# Altium PCB Arduino_DUE_Magic_Pen_rev03_no_FTD.PcbDoc (part 1 of 2)
Units mil, origin at the board's own origin, x right, y up, seen from the top; angles counter-clockwise.
Board outline 4416.66 x 2112 mil, 4 copper layers (Top Layer, Mid-Layer 1, Mid-Layer 2, Bottom Layer); 151 components, 188 nets, 610 pads, 191 vias.
Unrouted connection lines stored in the file: 5.
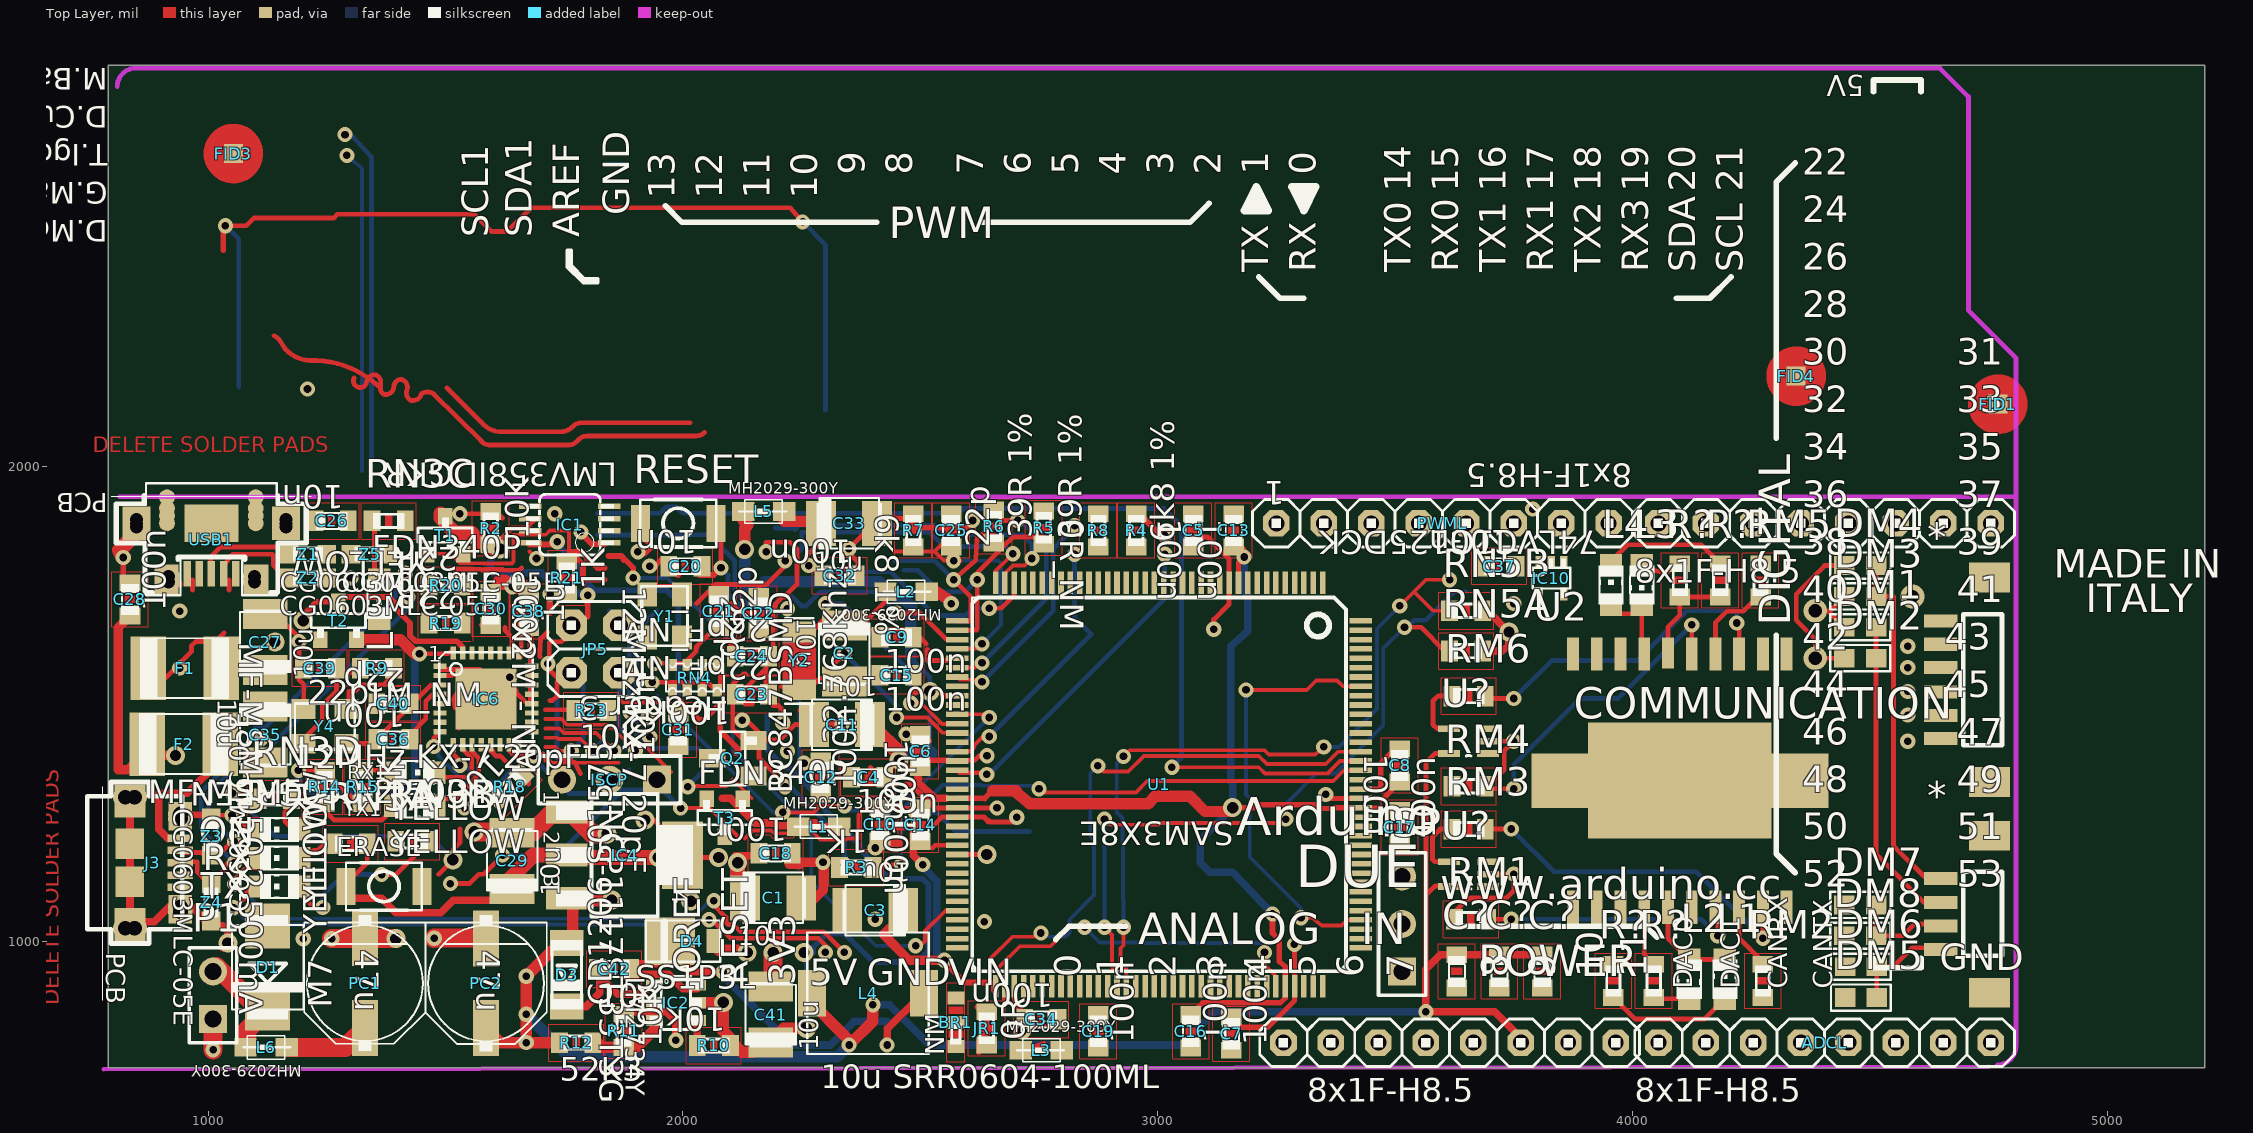
[diagram p0: Top Layer view]
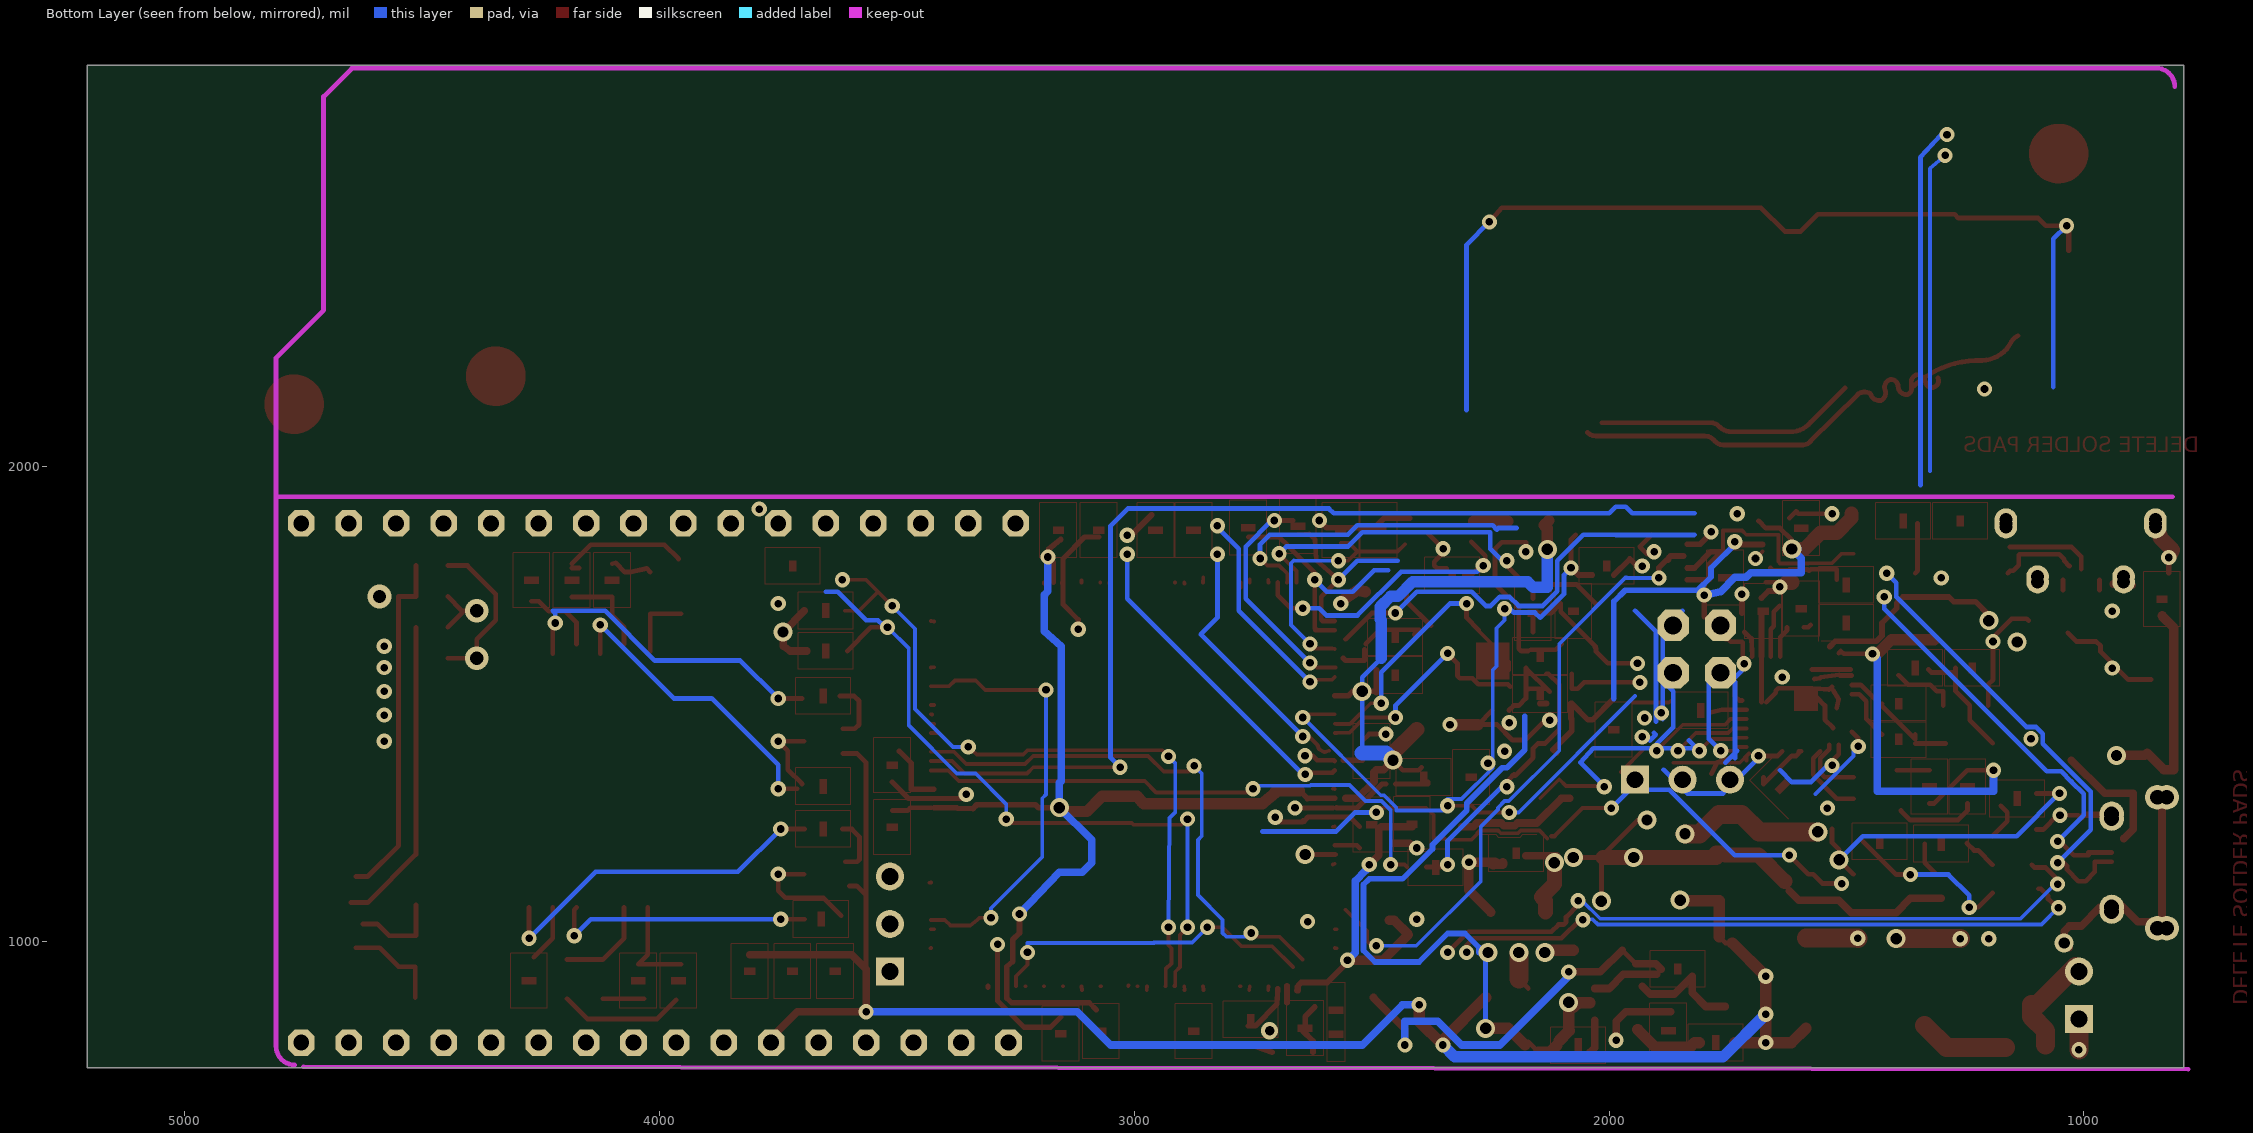
[diagram p1: Bottom Layer view, seen from below]
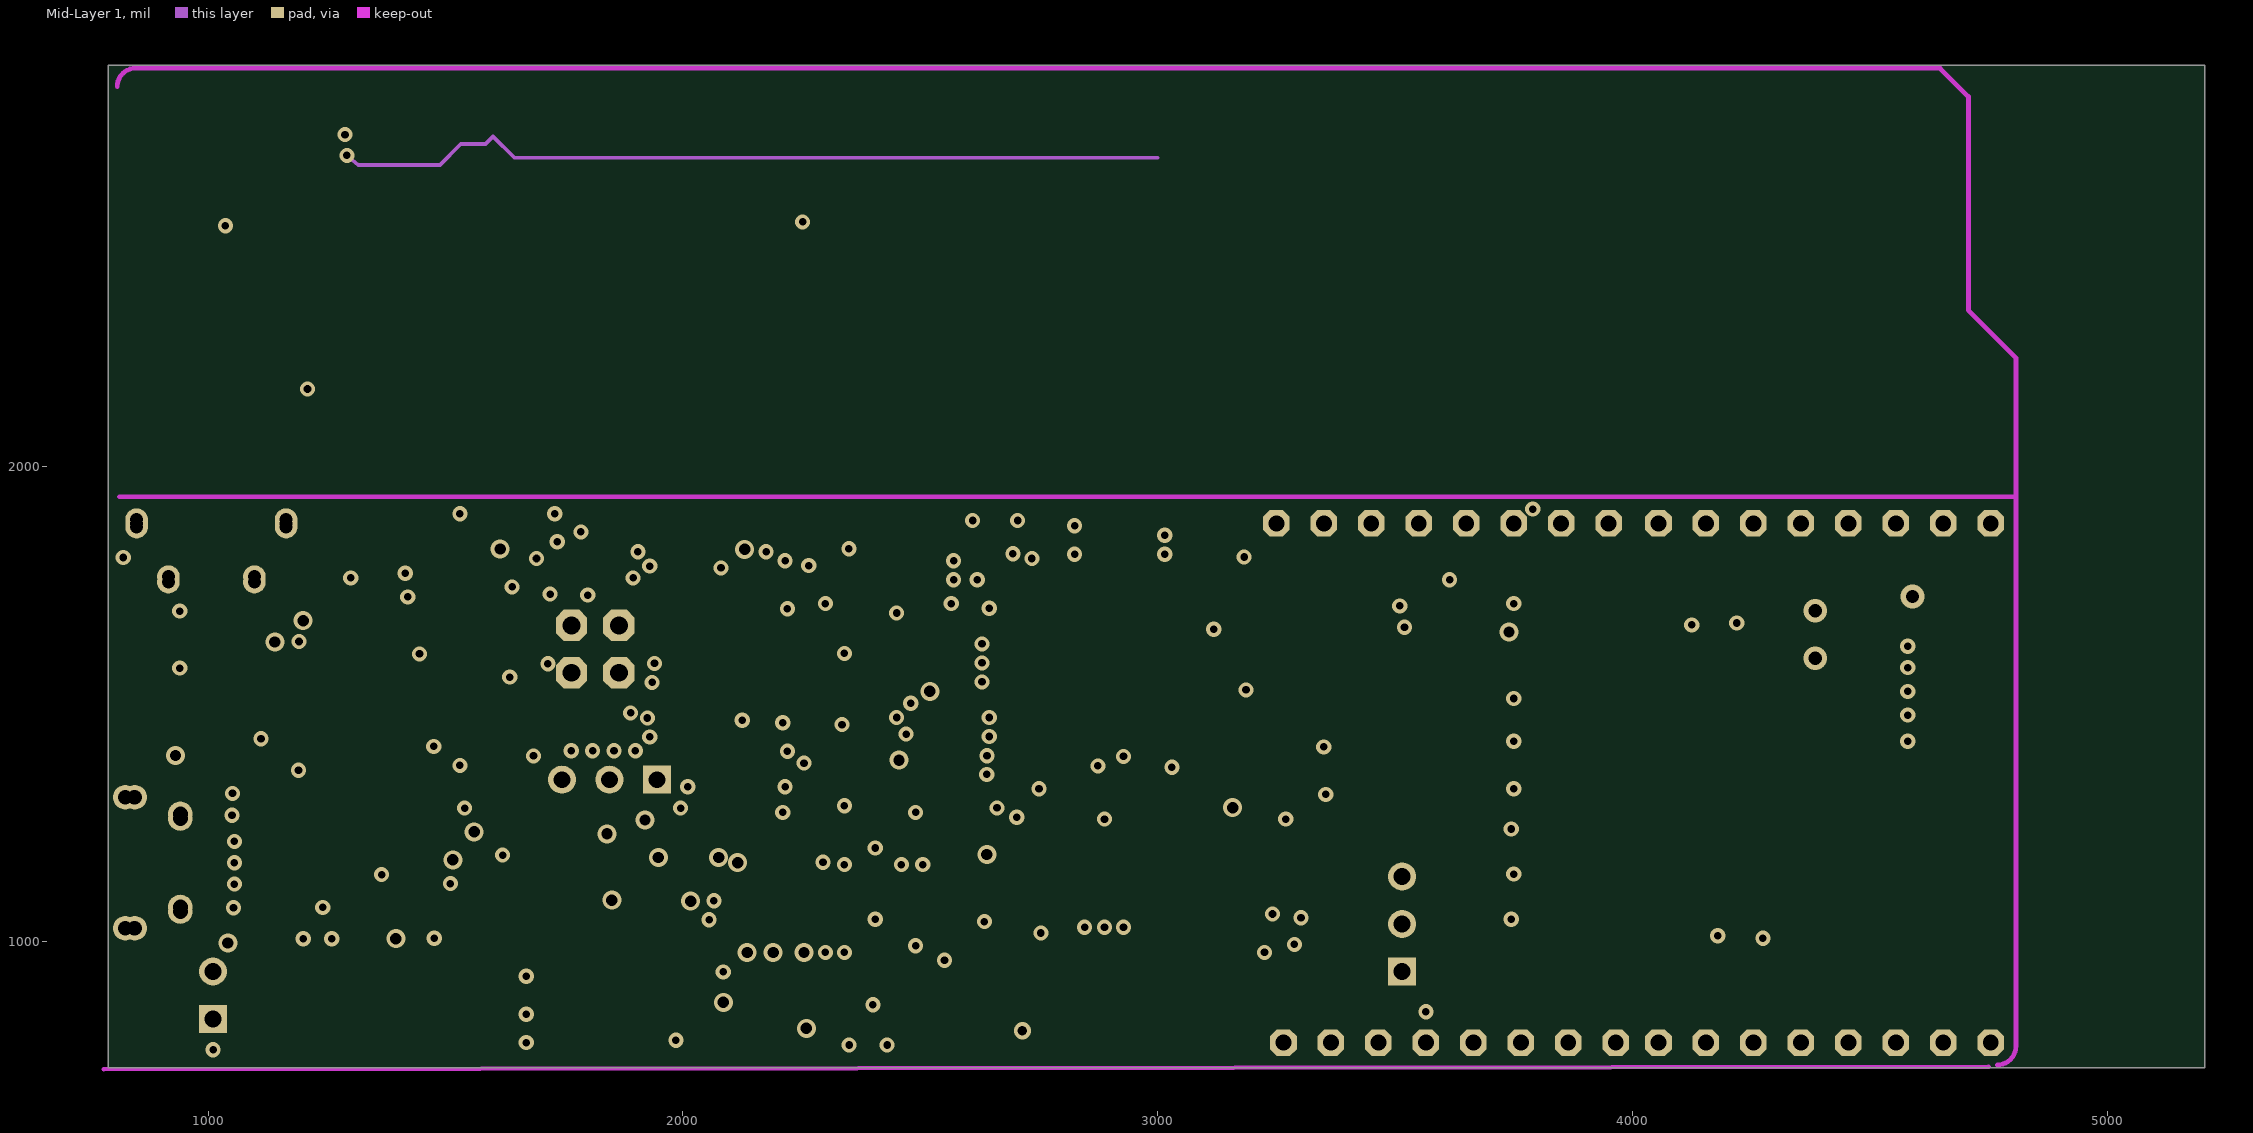
[diagram p2: Mid-Layer 1]
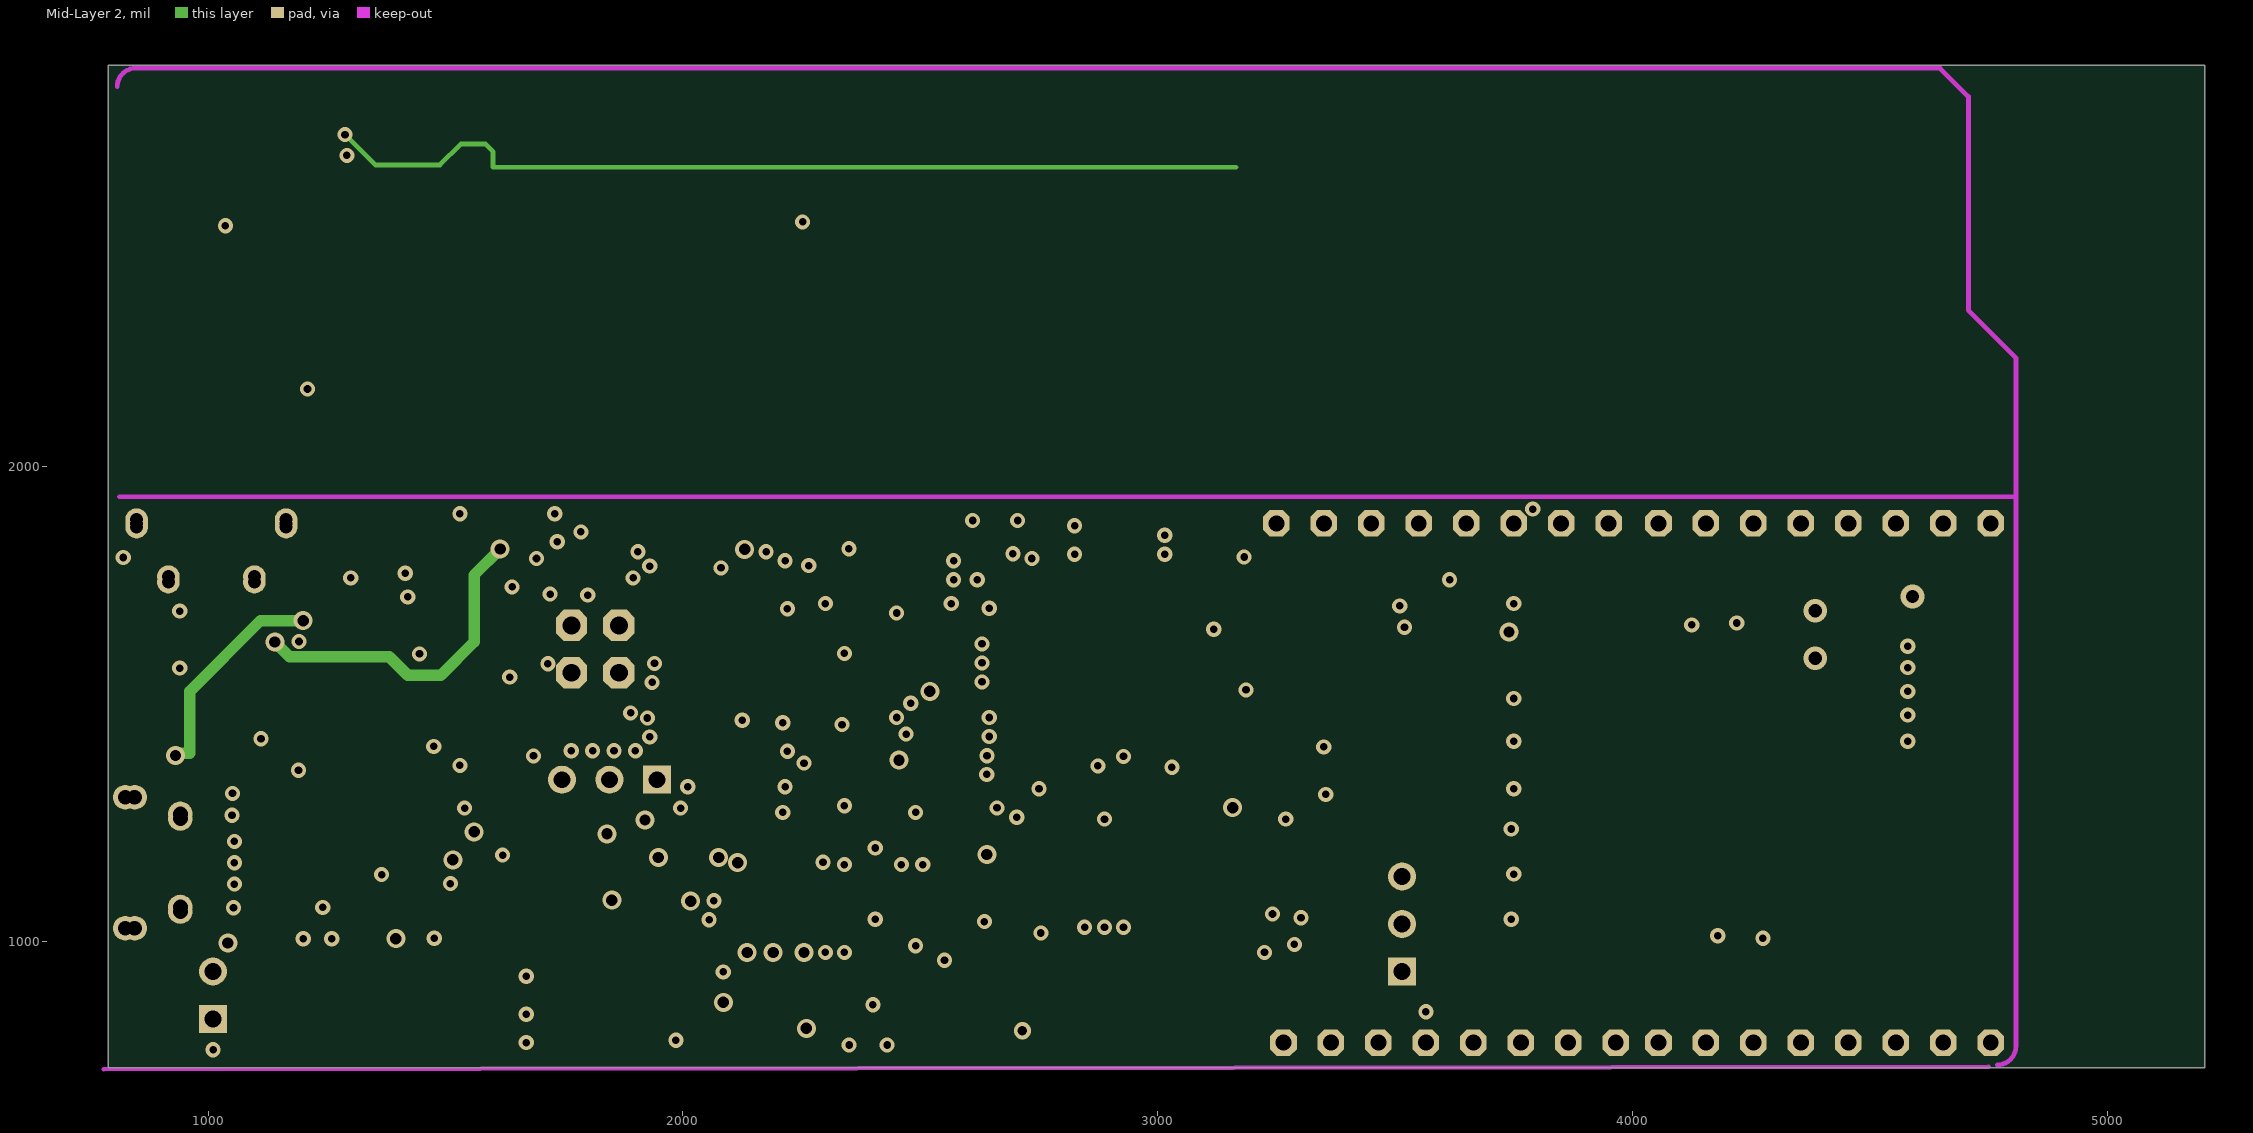
[diagram p3: Mid-Layer 2]

## Layer stack, top to bottom
Top Solder: solder mask 0.4, Solder Resist, Dk 3.5
Top Layer: signal copper 1.4
Dielectric1: core 12.6, FR-4, Dk 4.8
Mid-Layer 1: signal copper 1.4
Dielectric2: prepreg 12.6, FR-4, Dk 4.8
Mid-Layer 2: signal copper 1.4
Dielectric3: core 12.6, FR-4, Dk 4.8
Bottom Layer: signal copper 1.4
Bottom Solder: solder mask 0.4, Solder Resist, Dk 3.5

## Board outline
789.13,733 5205.79,733 5205.79,2845 789.13,2845

## Design rules (kind name [scope] priority, off if disabled: settings)
AssemblyTestPointUsage [All] p1 off:
AssemblyTestpoint [All] p1 off: testpointundercomponent=TRUE minsize=40 maxsize=100 preferedsize=60 minholesize=0 maxholesize=40 preferedholesize=32 testpointgrid=1 usegrid=TRUE gridtolerance=0.01 allowsidetop=TRUE allowsidebottom=TRUE
Clearance [All] p1: gap=4
PolygonConnect [All] p1: connectstyle=Relief reliefconductorwidth=10 reliefentries=4 polygonreliefangle="90 Angle" airgapwidth=10
RoutingVias [All] p1: holewidth=28 width=50 viastyle="Through Hole" minholewidth=28 minwidth=50 maxholewidth=28 maxwidth=50
SolderMaskExpansion [All] p1: expansion=4
Width [All] p1: maxlimit=10 minlimit=10 preferedwidth=10
28 further rules are at their usual default settings.

## Components (designator, comment, footprint, x,y, rotation, side; value= is the part's Value field where it differs from the comment)
* "DF13-4P" DF13C4P 4650,1106.59 r90 top
* "DF13C-6P-1.25V(50)" DF13C6P 4650,1550.41 r90 top
ADCL "8x1F-H8.5" 1X08 4405,786 r0 top
BR1 "NM" J0402 2575,854.41 r270 top
C1 "10u" SMC_B 2190,1091 r0 top
C2 "10u" SMC_B 2340,1606 r270 top
C3 "10u" SMC_B 2405,1065 r180 top
C4 "100n" C0603-ROUND#1 2390,1345 r0 top
C5 "100n" C0603-ROUND#1 3075,1865 r270 top
C6 "100n" C0603-ROUND#1 2500,1400 r270 top
C7 "100n" C0603-ROUND#1 3155,805 r90 top
C8 "100n" C0603-ROUND#2 3510,1370 r270 top
C9 "100n" C0603-ROUND#1 2450,1640 r0 top
C10 "100n" C0603-ROUND#1 2415,1246 r90 top
C11 "10u" SMC_B 2335,1456 r180 top
C12 "100n" C0603-ROUND#1 2290,1345 r90 top
C13 "100n" C0603-ROUND#1 3160,1865 r270 top
C14 "100n" C0603-ROUND#1 2500,1245 r270 top
C15 "100n" C0603-ROUND#1 2450,1560 r0 top
C16 "100n" C0603-ROUND#1 3070,810 r90 top
C17 "100n" C0603-ROUND#1 3510,1240 r90 top
C18 "100n" C0603-ROUND#2 2195,1185 r180 top
C19 "100n" C0603-ROUND#1 2875,810 r90 top
C20 "10n" C0603-ROUND#1 2005,1790 r180 top
C21 "22p" C0603-ROUND#1 2075,1695 r90 top
C22 "22p" C0603-ROUND#1 2160,1691 r270 top
C23 "22pF_NM" C0603-ROUND#1 2145,1520 r180 top
C24 "22pF_NM" C0603-ROUND#1 2145,1600 r180 top
C25 "22p" C0603-ROUND#1 2565,1865 r90 top
C26 "10n" C0603-ROUND#1 1260,1885 r180 top
C27 "10u" SMC_B 1120,1630 r90 top
C28 "100n" C0603-ROUND#1 835,1720 r90 top
C29 "10u" SMC_B 1640,1169.06 r90 top
C30 "100n" C0603-ROUND#1 1595,1700 r270 top
C31 "100n" C0603-ROUND#1 1990,1445 r90 top
C32 "100n" C0603-ROUND#1 2330,1770 r180 top
C33 "10u" SMC_B 2350,1880 r0 top
C34 "100n" C0603-ROUND#1 2755,835 r180 top
C35 "10u" SMC_B 1120,1435 r270 top
C36 "100n" C0603-ROUND#1 1390,1425 r180 top
C37 "100n" C0603-ROUND#1 3720,1790 r180 top
C38 "1u" C0603-ROUND#1 1675,1695 r90 top
C39 "22p" C0603-ROUND#1 1235,1575 r0 top
C40 "22p" C0603-ROUND#1 1390,1500 r180 top
C41 "10u" SMC_B 2185,845 r90 top
C42 "10n" C0603-ROUND#1 1855,941 r0 top
C? "100nF" C0603-ROUND#1 3630,936 r270 top
C? "100nF" C0603-ROUND#1 3720,936 r270 top
C? "100nF" C0603-ROUND#1 3810,936 r270 top
COMMUNICATION "8x1F-H8.5" 1X08 4405,1880 r0 top
D1 "M7" SMB 1125,945 r90 top
D3 "CD1206-S01575" MINIMELF 1755,929.07 r90 top
D4 "SS1P3L" DO220AAL 2000.04,1000 r0 top
DM1 "M7" 0603 4480,1661 r180 top
DM2 "M7" 0603 4480,1596 r0 top
DM3 "M7" 0603 4480,1726 r180 top
DM4 "M7" 0603 4480,1791 r0 top
DM5 "M7" 0603 4481.54,881 r180 top
DM6 "M7" 0603 4481.54,946 r0 top
DM7 "M7" 0603 4480,1076 r180 top
DM8 "M7" 0603 4480,1011 r0 top
ERASE "" SMD_157SW 1370,1115 r0 top
F1 "MF-MSMF050-2 500mA" L1812 950,1575 r180 top
F2 "MF-MSMF050-2 500mA" L1812 947.98,1415 r0 top
FID1 "*" FIDUCIA-MOUNT 4770,2131 r0 top
FID3 "*" FIDUCIA-MOUNT 1052.98,2659 r0 top
FID4 "*" FIDUCIA-MOUNT 4345,2190 r0 top
IC1 "LMV358IDGKR" MSOP08 1761.81,1877.24 r90 top
IC2 "LM2734Y" SOT23-6 1985,870 r270 top
IC4 "NCP1117ST33T3G -3V3" SOT223 1877,1181 r270 top
IC6 "ATMEGA16U2-MU" MLF32 1585,1510 r0 top
IC10 "74LVC1G125DCK" SC70-5 3829.41,1764.46 r180 top
ISCP "Header 3" HDR1X3 1945,1340 r180 top
ISP "Header 3" HDR1X3 3515,936 r90 top
J3 "USB-MICRO B" CON2_USB_MICRO_B_AT 835,1165 r270 top
JP5 "2x2M - NM" 2X02 1815,1615 r270 top
JR1 "0R" R0603-ROUND#1 2640,816 r90 top
L "YELLOW" CHIP-LED0805 1360,1720 r180 top
L1 "MH2029-300Y" 0805 2286.05,1241 r0 top
L1 "BLUE" CHIP-LED0805 4195,919.66 r0 top
L2 "MH2029-300Y" 0805 2470,1736 r180 top
L2 "GREEN" CHIP-LED0805 4120,919.66 r180 top
L3 "MH2029-300Y" 0805 2755,770 r0 top
L3 "BLUE" CHIP-LED0805 4020,1750 r180 top
L4 "10u SRR0604-100ML" SRR0604 2390,890 r0 top
L4 "GREEN" CHIP-LED0805 3955,1750 r0 top
L5 "MH2029-300Y" 0805 2170,1905 r0 top
L6 "MH2029-300Y" 0805 1121.69,776 r180 top
ON "GREEN" CHIP-LED0805 1150,1235 r90 top
P1 "Header 2" HDR1X2 1010,836 r90 top
PC1 "47u" PANASONIC_D 1330,911.51 r270 top
PC2 "47u" PANASONIC_D 1585,911 r270 top
POWER "8x1F-H8.5" 1X08 3615,786 r0 top
PWML "8x1F-H8.5" 1X08 3600,1880 r180 top
Q2 "BC847BSMD" SOT23 2105,1385 r90 top
R2 "10K" R0603-ROUND#1 1595,1870 r90 top
R3 "1K" R0603-ROUND#1 2365,1155 r180 top
R4 "6k8 1%" R0603-ROUND#1 2955,1865 r90 top
R5 "39R 1%" R0603-ROUND#1 2760,1871 r90 top
R6 "39R 1%" R0603-ROUND#1 2655,1873.5 r90 top
R7 "6k8 1%" R0603-ROUND#1 2485,1865 r270 top
R8 "0R_NM" R0603-ROUND#1 2875,1865 r270 top
R9 "1M_NM" R0603-ROUND#1 1355,1575 r0 top
R10 "10k" R0603-ROUND#1 2065,780 r180 top
R11 "10K" R0603-ROUND#1 1875,811 r90 top
R12 "52K3" R0603-ROUND#1 1775,786 r0 top
R14 "1K" R0603-ROUND#2 1245,1325 r270 top
R15 "1K" R0603-ROUND#1 1325,1325 r90 top
R18 "10K" R0603-ROUND#3 1635,1325 r225 top
R19 "22R" R0603-ROUND#4 1500,1670 r180 top
R20 "22R" R0603-ROUND#1 1500,1750 r180 top
R21 "1K" R0603-ROUND#1 1755,1765 r90 top
R23 "10K" R0603-ROUND#1 1807.13,1485.75 r0 top
R? "1K" R0603-ROUND#5 4100,1760 r270 top
R? "1K" R0603-ROUND#1 4185,1760 r270 top
R? "1K" R0603-ROUND#1 3960,916 r90 top
R? "1K" R0603-ROUND#1 4045,916 r90 top
RESET "MYSMD_PB157" SMD_157SW 1990,1880 r180 top
RM1 "330R" R0603-ROUND#1 3660,1046 r0 top
RM2 "330R" R0603-ROUND#1 4275,916 r90 top
RM3 "330R" R0603-ROUND#1 3655,1236 r0 top
RM4 "330R" R0603-ROUND#1 3655,1326 r0 top
RM5 "330R" R0603-ROUND#1 4270,1760 r270 top
RM6 "330R" R0603-ROUND#6 3655,1516 r0 top
RN3A "1K" R0603-ROUND#1 1300,1205 r180 top
RN3B "1K" R0603-ROUND#1 1430,1210 r0 top
RN3C "1K" R0603-ROUND#1 1380,1885 r180 top
RN3D "1K" R0603-ROUND#1 1140,1300 r0 top
RN4 "100K" CAT16 2025,1555 r180 top
RN5A "1K5" R0603-ROUND#1 3650,1611 r0 top
RN5B "1K5" R0603-ROUND#1 3650,1696 r180 top
RX "YELLOW" CHIP-LED0805 1150,1175 r90 top
RX1 "YELLOW" CHIP-LED0805 1435,1355 r270 top
T1 "FDN340P" SOT-23 1500,1855 r180 top
T2 "FDN340P" SOT-23 1275,1675 r180 top
T3 "FDN340P" SOT-23 2087,1260 r0 top
TX "YELLOW" CHIP-LED0805 1150,1115 r90 top
TX1 "YELLOW" CHIP-LED0805 1435,1285 r270 top
U1 "SAM3X8E" LQFP144 3002.98,1330 r180 top
U2 "L298P" POWER-SO20_L298P(Primary) 4100,1338 r0 top
U? "SN74AHC1G04DCKR" SOT65P210X110-5N 3655,1421 r180 top
U? "SN74AHC1G04DCKR" SOT65P210X110-5N 3655,1141 r180 top
USB1 "MICRO-USB-AB1" MCR-AB1-S-RA-SMT 1006.5,1880 r180 top
Y1 "12MHz KX-7 20pF" CRYSTAL-3.2-2.5 1961.42,1684.72 r270 top
Y2 "32.768Khz" RESONATOR_EPSON_FC_145 2245,1590 r90 top
Y4 "12MHz KX-7 20pF" CRYSTAL-3.2-2.5 1245.72,1452.42 r0 top
Z1 "CG0603MLC-05E" CT/CN0603#1 1210,1815 r0 top
Z2 "CG0603MLC-05E" CT/CN0603#1 1210,1765 r0 top
Z3 "CG0603MLC-05E" CT/CN0603#1 1006,1220.37 r270 top
Z4 "CG0603MLC-05E" CT/CN0603#1 1006,1081.63 r90 top
Z5 "CG0603MLC-05E" CT/CN0603#2 1345,1810 r90 top

## Footprints (in the part's own frame and the unit in brackets; to place one, negate y for a bottom-side part, rotate by r counter-clockwise, add the part's x,y. Pads: shape width x height; smd on the part's side, far side on the other; paste and mask are expansions set on the pad)
1X08 [mil]
  oct 56x56 hole 33.46: 1(-350,0) 2(-250,0) 3(-150,0) 4(-50,0) 5(50,0) 6(150,0) 7(250,0) 8(350,0)
  silkscreen extent -400,-50 400,50
2X02 [mil]
  oct 66x66 hole 37.4: 1(-50,-50) 2(-50,50) 3(50,-50) 4(50,50)
  silkscreen extent -100,-100 100,100
0603 [mm]
  rect 1.1x1 smd: A(-0.85,0) C(0.85,0)
  silkscreen extent -1.6,-0.7 1.6,0.7
0805 [mm]
  rect 1.2x1 smd: 1(-1.1,0) 2(1.1,0)
  silkscreen extent -1.3,-0.63 1.2,0.63
C0603-ROUND#1 [mil]
  rect 35.37x43.31 smd: 1(-35,0) 2(35,0)
  Top Layer region: -7.87,-11.81 7.87,-11.81 7.87,11.81 -7.87,11.81
  Top Layer lines w2: -57.99,-38.7 57.99,-38.7 57.99,38.7 -57.99,38.7 -57.99,-38.7
  silkscreen extent -33,-18 33,19
C0603-ROUND#2 [mil]
  rect 35.37x43.31 smd: 1(-35,0) 2(35,0)
  Top Layer region: -7.87,-11.81 7.87,-11.81 7.87,11.81 -7.87,11.81
  Top Layer lines w2: 57.99,-38.7 -57.99,-38.7 -57.99,38.7 57.99,38.7
  silkscreen extent -33,-19 33,19
CAT16 [mm]
  rect 0.5x0.65 smd: 1(-1.2,-0.675) 2(-0.4,-0.675) 3(0.4,-0.675) 4(1.2,-0.675) 5(1.2,0.675) 6(0.4,0.675) 7(-0.4,0.675) 8(-1.2,0.675)
  silkscreen extent -1.55,-0.75 1.55,0.75
CHIP-LED0805 [mm]
  rect 1.2x1.2 smd: A(0,-1.05) C(0,1.05)
  silkscreen extent -0.68,-1.05 0.68,1.05
CON2_USB_MICRO_B_AT [mil]
  rect 16x53 smd: P1(-52,106) P2(-26,106) P3(0,106) P4(26,106) P5(52,106)
  round 51.5 hole 31.5: P$1(-103,106) P$2(-93,106) P$3(-138,-10) P$4(-138,10) P$5(138,10) P$6(138,-10) P$7(93,106) P$8(103,106)
  rect 70x65 smd: S1(-130,0) S2(130,0)
  rect 60x50 smd: S3(-98,106) S4(98,106)
  rect 64x60 smd: S5(-40,0) S6(40,0)
  silkscreen extent -170,-90 290,110
CRYSTAL-3.2-2.5 [mm]
  rect 1.3x1.05 smd: 1(-1.15,-0.925) 2(1.15,-0.925) 3(1.15,0.925) 4(-1.15,0.925)
  silkscreen extent -1.6,-1.25 1.6,1.25
CT/CN0603#1 [mm]
  rect 1x1 smd: 1(-1,0) 2(1,0)
  silkscreen extent -0.75,-0.35 0.75,0.35
CT/CN0603#2 [mm]
  rect 1x1 smd: 1(0.127,1.127) 2(0.127,-0.873)
  silkscreen extent -0.22,-0.62 0.48,0.88
DF13C4P [mm]
  rect 0.7x1.8 smd: 1(0.65,0) 2(-0.65,0) 3(-1.9,0) 4(-3.15,0)
  rect 1.6x2.2 smd: 5(-5.475,-2.6) 5(2.925,-2.6)
  silkscreen extent -3.5,-3.27 1,-1.2
DF13C6P [mm]
  rect 0.7x1.8 smd: 1(3.15,0) 2(1.9,0) 3(0.65,0) 4(-0.65,0) 5(-1.9,0) 6(-3.15,0)
  rect 1.6x2.2 smd: 7(-5.475,-2.6) 7(5.475,-2.6)
  silkscreen extent -3.5,-3.27 3.5,-1.2
DO220AAL [mil]
  rect 105x100 smd: P$1(-27.56,0)
  rect 30x50 smd: P$2(64.96,0)
  silkscreen extent -79,-43 79,43
FIDUCIA-MOUNT [mil]
  rect 40x40 smd: P$1(0,0)
  Top Layer circle w5: c0,0 r59.06
  Top Layer circle w86: c0,0 r19.68
HDR1X2 [mm] "Connector; Header; 2 Position"
  rect 1.5x1.5 hole 0.9: 1(0,0)
  round 1.5 hole 0.9: 2(2.54,0)
  silkscreen extent -1.27,-1.27 3.81,1.27
HDR1X3 [mm] "Connector; Header; 3 Position"
  rect 1.5x1.5 hole 0.9: 1(0,0)
  round 1.5 hole 0.9: 2(2.54,0) 3(5.08,0)
  silkscreen extent -1.27,-1.27 6.35,1.27
J0402 [mm]
  rect 0.7x0.9 smd: 1(-0.65,0) 2(0.65,0) 3(1.95,0)
  Top Layer region: 1.1,-0.4 1.5,-0.4 1.5,0.4 1.1,0.4
  Top Layer region: -0.2,-0.4 0.2,-0.4 0.2,0.4 -0.2,0.4
  Top Layer lines w0.051: 2.773,-0.483 -1.473,-0.483 -1.473,0.483 2.773,0.483 2.773,-0.483
  silkscreen extent 0.72,-0.3 1.83,0.29
L1812 [mm]
  rect 1.9x3.4 smd: 1(-1.95,0) 2(1.95,0)
  silkscreen extent -2.39,-1.65 2.4,1.65
LQFP144 [mm]
  rect 0.3x1.2 smd: 1(-8.75,-10.8) 2(-8.25,-10.8) 3(-7.75,-10.8) 4(-7.25,-10.8) 5(-6.75,-10.8) 6(-6.25,-10.8) 7(-5.75,-10.8) 8(-5.25,-10.8) 9(-4.75,-10.8) 10(-4.25,-10.8) 11(-3.75,-10.8) 12(-3.25,-10.8) 13(-2.75,-10.8) 14(-2.25,-10.8) 15(-1.75,-10.8) 16(-1.25,-10.8) 17(-0.75,-10.8) 18(-0.25,-10.8) 19(0.25,-10.8) 20(0.75,-10.8) 21(1.25,-10.8) 22(1.75,-10.8) 23(2.25,-10.8) 24(2.75,-10.8) 25(3.25,-10.8) 26(3.75,-10.8) 27(4.25,-10.8) 28(4.75,-10.8) 29(5.25,-10.8) 30(5.75,-10.8) 31(6.25,-10.8) 32(6.75,-10.8) 33(7.25,-10.8) 34(7.75,-10.8) 35(8.25,-10.8) 36(8.75,-10.8) 73(8.75,10.8) 74(8.25,10.8) 75(7.75,10.8) 76(7.25,10.8) 77(6.75,10.8) 78(6.25,10.8) 79(5.75,10.8) 80(5.25,10.8) 81(4.75,10.8) 82(4.25,10.8) 83(3.75,10.8) 84(3.25,10.8) 85(2.75,10.8) 86(2.25,10.8) 87(1.75,10.8) 88(1.25,10.8) 89(0.75,10.8) 90(0.25,10.8) 91(-0.25,10.8) 92(-0.75,10.8) 93(-1.25,10.8) 94(-1.75,10.8) 95(-2.25,10.8) 96(-2.75,10.8) 97(-3.25,10.8) 98(-3.75,10.8) 99(-4.25,10.8) 100(-4.75,10.8) 101(-5.25,10.8) 102(-5.75,10.8) 103(-6.25,10.8) 104(-6.75,10.8) 105(-7.25,10.8) 106(-7.75,10.8) 107(-8.25,10.8) 108(-8.75,10.8)
  rect 1.2x0.3 smd: 37(10.8,-8.75) 38(10.8,-8.25) 39(10.8,-7.75) 40(10.8,-7.25) 41(10.8,-6.75) 42(10.8,-6.25) 43(10.8,-5.75) 44(10.8,-5.25) 45(10.8,-4.75) 46(10.8,-4.25) 47(10.8,-3.75) 48(10.8,-3.25) 49(10.8,-2.75) 50(10.8,-2.25) 51(10.8,-1.75) 52(10.8,-1.25) 53(10.8,-0.75) 54(10.8,-0.25) 55(10.8,0.25) 56(10.8,0.75) 57(10.8,1.25) 58(10.8,1.75) 59(10.8,2.25) 60(10.8,2.75) 61(10.8,3.25) 62(10.8,3.75) 63(10.8,4.25) 64(10.8,4.75) 65(10.8,5.25) 66(10.8,5.75) 67(10.8,6.25) 68(10.8,6.75) 69(10.8,7.25) 70(10.8,7.75) 71(10.8,8.25) 72(10.8,8.75) 109(-10.8,8.75) 110(-10.8,8.25) 111(-10.8,7.75) 112(-10.8,7.25) 113(-10.8,6.75) 114(-10.8,6.25) 115(-10.8,5.75) 116(-10.8,5.25) 117(-10.8,4.75) 118(-10.8,4.25) 119(-10.8,3.75) 120(-10.8,3.25) 121(-10.8,2.75) 122(-10.8,2.25) 123(-10.8,1.75) 124(-10.8,1.25) 125(-10.8,0.75) 126(-10.8,0.25) 127(-10.8,-0.25) 128(-10.8,-0.75) 129(-10.8,-1.25) 130(-10.8,-1.75) 131(-10.8,-2.25) 132(-10.8,-2.75) 133(-10.8,-3.25) 134(-10.8,-3.75) 135(-10.8,-4.25) 136(-10.8,-4.75) 137(-10.8,-5.25) 138(-10.8,-5.75) 139(-10.8,-6.25) 140(-10.8,-6.75) 141(-10.8,-7.25) 142(-10.8,-7.75) 143(-10.8,-8.25) 144(-10.8,-8.75)
  silkscreen extent -10,-10 10,10
MCR-AB1-S-RA-SMT [mm]
  rect 0.4x1.35 smd: 1(-1.3,2.7) 2(-0.65,2.7) 3(0,2.7) 4(0.65,2.7) 5(1.3,2.7)
  round 1.208 hole 0.7: P$1(-4,0.2) P$3(-4,0) P$4(-4,-0.2) P$5(4,0.2) P$6(4,0) P$7(4,-0.2) P$8(-2.3,3.15) P$9(-2.3,2.85) P$10(2.3,3.15) P$11(2.3,2.85)
  rect 2.9x2 smd: P$2(0,0)
  rect 1.3x1.6 smd: S1(-2.4,3) S2(2.4,3)
  rect 1.5x1.8 smd: S3(-4,0) S4(4,0)
  round 0.85 smd: ""(-2.375,-1.4) ""(-2.375,-0.8) ""(-2.375,-0.4) ""(-2.375,0) ""(2.375,-1.4) ""(2.375,-0.8) ""(2.375,-0.4) ""(2.375,0)
  Top Layer lines w0.075: -3.8,0.525 -3.8,-0.525
  silkscreen extent -5.35,-2.15 5.35,3.85
MINIMELF [mm]
  rect 1.4x1.8 smd: A(1.7,0) C(-1.7,0)
  silkscreen extent -1.85,-0.86 1.85,0.86
MLF32 [mm]
  rect 0.7x0.28 smd: 1(-2.45,1.75) 2(-2.45,1.25) 3(-2.45,0.75) 4(-2.45,0.25) 5(-2.45,-0.25) 6(-2.45,-0.75) 7(-2.45,-1.25) 8(-2.45,-1.75) 17(2.45,-1.75) 18(2.45,-1.25) 19(2.45,-0.75) 20(2.45,-0.25) 21(2.45,0.25) 22(2.45,0.75) 23(2.45,1.25) 24(2.45,1.75)
  rect 0.28x0.7 smd: 9(-1.75,-2.45) 10(-1.25,-2.45) 11(-0.75,-2.45) 12(-0.25,-2.45) 13(0.25,-2.45) 14(0.75,-2.45) 15(1.25,-2.45) 16(1.75,-2.45) 25(1.75,2.45) 26(1.25,2.45) 27(0.75,2.45) 28(0.25,2.45) 29(-0.25,2.45) 30(-0.75,2.45) 31(-1.25,2.45) 32(-1.75,2.45)
  rect 3.254x3.254 smd: 33(0,0)
  Top Layer region: -0.635,-0.635 0.635,-0.635 0.635,0.635 -0.635,0.635
  silkscreen extent -2.5,-2.5 2.5,2.5
MSOP08 [mm]
  rect 0.3x1.2 smd: 1(-0.976,-2.113) 2(-0.326,-2.113) 3(0.324,-2.113) 4(0.974,-2.113) 5(0.974,2.112) 6(0.324,2.112) 7(-0.326,2.112) 8(-0.976,2.112)
  silkscreen extent -1.63,-2.36 1.62,2.36
PANASONIC_D [mm]
  rect 3x1.4 smd: +(2.4,0) -(-2.4,0)
  silkscreen extent -3.65,-3.25 3.65,3.25
POWER-SO20_L298P(Primary) [mil]
  rect 25x70 smd: P$1(-225,-267) P$2(-175,-267) P$3(-125,-267) P$4(-75,-267) P$5(-25,-267) P$6(25,-267) P$7(75,-267) P$8(125,-267) P$9(175,-267) P$10(225,-267) P$11(225,267) P$12(175,267) P$13(125,267) P$14(75,267) P$15(25,267) P$17(-75,267) P$18(-125,267) P$19(-175,267) P$20(-225,267)
  rect 25x65 smd: P$16(-25,269)
  rect 386x244 smd: P$21(0,0)
  rect 120x115 smd: P$22(-253,0) P$23(253,0)
R0603-ROUND#1 [mil]
  rect 35.37x43.31 smd: 1(-35,0) 2(35,0)
  Top Layer region: -7.87,-15.75 7.87,-15.75 7.87,15.75 -7.87,15.75
  Top Layer lines w2: -57.99,38.7 -57.99,-38.7 57.99,-38.7 57.99,38.7 -57.99,38.7
  silkscreen extent -33,-17 33,17
R0603-ROUND#2 [mil]
  rect 35.37x43.31 smd: 1(-35,0) 2(35,0)
  Top Layer region: -7.87,-15.75 7.87,-15.75 7.87,15.75 -7.87,15.75
  Top Layer lines w2: 57.99,-38.7 -35,-38.7 -57.99,-38.7 -57.99,38.7 57.99,38.7 57.99,-38.7
  silkscreen extent -33,-17 33,17
R0603-ROUND#3 [mil]
  rect 35.37x43.31 smd: 1(-35,0) 2(35,0)
  Top Layer region: -7.87,-15.75 7.87,-15.75 7.87,15.75 -7.87,15.75
  Top Layer lines w2: 57.99,38.7 -57.99,38.7 -57.99,-38.7
  silkscreen extent -33,-17 33,17
R0603-ROUND#4 [mil]
  rect 35.37x43.31 smd: 1(-35,0) 2(35,0)
  Top Layer region: -7.87,-15.75 7.87,-15.75 7.87,15.75 -7.87,15.75
  Top Layer lines w2: 57.99,38.7 57.99,-38.7 -57.99,-38.7 -57.99,38.7
  silkscreen extent -33,-17 33,17
R0603-ROUND#5 [mil]
  rect 35.37x43.31 smd: 1(-35,0) 2(35,0)
  Top Layer region: -7.87,-15.75 7.87,-15.75 7.87,15.75 -7.87,15.75
  Top Layer lines w2: 57.99,-38.7 57.99,38.7 -57.99,38.7 -57.99,-38.7 -51.34,-38.7 -31.34,-38.7 -26.34,-38.7 -21.34,-38.7 -17.34,-38.7 57.99,-38.7
  silkscreen extent -33,-17 33,17
R0603-ROUND#6 [mil]
  rect 35.37x43.31 smd: 1(-35,0) 2(35,0)
  Top Layer region: -7.87,-15.75 7.87,-15.75 7.87,15.75 -7.87,15.75
  Top Layer lines w2: -57.99,-38.7 -57.99,0 -57.99,38.7 57.99,38.7 57.99,-38.7 -50,-38.7 -57.99,-38.7
  silkscreen extent -33,-17 33,17
RESONATOR_EPSON_FC_145 [mm]
  rect 1.1x1.8 smd: P$1(-1.55,0) P$2(1.55,0)
  Top Layer region: -1,-0.9 1,-0.9 1,0.9 -1,0.9
  Top Layer region: -1,-0.9 1,-0.9 1,0.9 -1,0.9
  Top Layer region: -1,-0.9 1,-0.9 1,0.9 -1,0.9
  silkscreen extent -2.29,-0.76 2.29,0.76
SC70-5 [mm]
  rect 0.4x0.7 smd: 1(-0.65,-0.85) 2(0,-0.85) 3(0.65,-0.85) 4(0.65,0.85) 5(-0.65,0.85)
  silkscreen extent -1,-1.05 1,1.05
SMB [mm]
  rect 2.4x2.4 smd: A(2.2,0) C(-2.2,0)
  silkscreen extent -2.79,-1.91 2.79,1.91
SMC_B [mm]
  rect 1.6x2.4 smd: +(-1.5,0) -(1.5,0)
  silkscreen extent -1.75,-1.35 1.75,1.35
SMD_157SW [mil]
  rect 40x78 smd: 1(-80,0) 2(80,0)
  silkscreen extent -80,-50 80,50
SOT23 [mm]
  rect 1x1.4 smd: 1(-0.95,-1.1) 2(0.95,-1.1) 3(0,1.1)
  silkscreen extent -1.42,-1.3 1.42,1.3
SOT23-6 [mm]
  rect 0.6x0.9 smd: 1(-0.95,-1.15) 2(0,-1.15) 3(0.95,-1.15) 4(0.95,1.15) 5(0,1.15) 6(-0.95,1.15)
  silkscreen extent -1.42,-1.4 1.42,1.4
SOT65P210X110-5N [mil]
  rect 46x14 smd: 1(-41,26) 2(-41,0) 3(-41,-26) 4(41,-26) 5(41,26)
  silkscreen extent -5,30 5,31
SOT223 [mil]
  rect 48x88 smd: 1(-91,-122) 2(0,-122) 3(91,-122)
  rect 141.73x86.61 smd: 4(0,122.01)
  silkscreen extent -129,-144 129,144
SOT-23 [mil]
  rect 31x35 smd: 1(1,-40) 2(-37,40) 3(39,40)
  silkscreen extent -56,-37 58,37
SRR0604 [mm]
  rect 1.5x2.5 smd: P$1(3,0) P$2(-3,0)
  silkscreen extent -3.25,-3.25 3.25,3.25

## Part data
*: library part DF13-4P-1.25H, "CONN SM DF13 4P RA 1.25H"
*: "CONN SM DF13C 6P"
ADCL COMMUNICATION POWER PWML: library part PINHD-1X8
BR1: library part J0402
C1 C2 C3 C11 C27 C29 C33 C35 C41: library part CPOL-EUSMCB
C4 C5 C6 C7 C8 C9 C10 C12 C13 C14 C15 C16 C17 C18 C19 C20 C21 C22 C23 C24 C25 C26 C28 C30 C31 C32 C34 C36 C37 C38 C39 C40 C42 C? C? C?: library part C-EUC0603
D1 DM1 DM2 DM3 DM4 DM5 DM6 DM7 DM8: library part DIODE-SMB
D3: library part DIODE-MINIMELF
ERASE: library part MYSMD_PB157
F1 F2: library part L-EUL1812
FID1 FID3 FID4: library part FIDUCIALMOUNT
IC1: library part LMV358MMX
IC2: library part LM2736Y
IC4: library part MC33269ST-3.3T3
ISCP ISP: "Header, 3-Pin"
J3: library part MYCON2_USB-MINI-B
JP5: library part PINHD-2X2
JR1 R2 R3 R4 R5 R6 R7 R8 R9 R10 R14 R15 R18 R19 R20 R21 R23 R? R? R? R? RM1 RM2 RM3 RM4 RM5 RM6 RN3A RN3B RN3C RN3D RN5A RN5B: library part R-EU_R0603
L L1 L2 L3 L4 ON RX RX1 TX TX1: library part LEDCHIP-LED0805
L1 L2 L3 L5 L6: library part WE-CBF_0805
L4: library part L-USSRR0604
P1: "Header, 2-Pin"
PC1 PC2: library part CPOL-EUD
R11 R12: library part R-EU_0603-RND
RN4: library part 4R-NCAT16
T1 T2 T3: library part PMOSSOT23
U1: library part ATSAM3X/AAU
U2: "IC BRIDGE DRIVER PAR 20POWERSO"
U? U?: "IC SINGLE INVERTER GATE SC70-5"
USB1: library part MICRO_USB
Y1 Y4: library part CRYSTAL-3.2-2.5
Y2: library part RESONATOR_EPSON_FC_145
Z1 Z2 Z3 Z4 Z5: library part VARISTORCN0603

## Via types
v1: diameter 32, hole 16, Top Layer to Bottom Layer, 160 vias
v2: diameter 40, hole 24, Top Layer to Bottom Layer, 26 vias
v3: diameter 50, hole 28, Top Layer to Bottom Layer, 3 vias
v4: diameter 36, hole 20, Top Layer to Bottom Layer, 1 vias
v5: diameter 32/32/32/32 (per signal layer), hole 16, Top Layer to Bottom Layer, 1 vias

## Nets (pads, with @x,y where several pads share a name; then routed paths per layer and width w, separated by ;. In a path a pad name is that pad's centre, name@x,y a point inside that pad or via, vN(x,y) a via of type N, cw(c..) or ccw(c..) an arc to the next point about the centre after c; other vN are vias at no path point)
8PB4: IC6.18 JP5.1 | length 344.3
  Top Layer w8: 1710.07,1408.54 1730.82,1408.54 1738.61,1400.75 1774.63,1400.75
  Bottom Layer w10: v1(1809.63,1400.75) 1831.63,1422.75 ; 1845,1696 1887,1654 1887,1468
8PB5: IC6.19 JP5.3 | length 271.3
  Top Layer w8: 1710.07,1428.22 1735.14,1428.22 1737.61,1425.75 1784.63,1425.75 1809.63,1400.75
  Bottom Layer w10: v1(1764.63,1400.75) 1789.63,1425.75 JP5.3@1789.63,1550.75
8PB6: IC6.20 JP5.2 | length 439
  Top Layer w8: 1710.07,1447.91 1739.45,1447.91 1749.11,1438.25 1817.13,1438.25 v1(1854.63,1400.75)
  Bottom Layer w10: 1901,1462.2 1901,1652 1945,1696 ; 1905.26,1438.7 1901.66,1435.1 1914.26,1422.5
8PB7: IC6.21 JP5.4 | length 392.1
  Top Layer w8: 1710.07,1467.59 1743.77,1467.59 1755.61,1455.75 1844.63,1455.75 v1(1899.63,1400.75)
  Bottom Layer w10: JP5.4@1889.63,1550.75 1864.63,1525.75 1864.63,1450.75 1899.63,1415.75 v1(1899.63,1400.75)
16U2-TX: IC6.9 IC10.2 | length 2913.2
  Top Layer w10: IC6.9@1516.1,1413.54 1516.1,1393.9 1530,1380 v1(1530,1370)
  Mid-Layer 2 w10: v1(1287.98,2699) 1351.98,2635 1487.98,2635 1531.98,2679 1583.98,2679 1599.98,2663 1599.98,2630 3165,2630
  Bottom Layer w10: v1(1287.98,2699) 1299.98,2699 1343.98,2651 1343.98,1960 ; v1(1530,1370) 1539.64,1370 1574.64,1335 1615,1335 1639.67,1359.67
  other v1: 3790,1910
+3V3: BR1.3 C1.+ C4.2 C5.2 C6.2 C7.2 C8.2 C18.2 C20.2 C29.+ C37.1 ERASE.1 IC1.6 IC4.2 IC4.4 IC10.5 JR1.1 L1.1 L2.1 POWER.2 POWER.4 R4.2 RN3A.1 RN3B.1 RN3D.1 RN5A.2 RN5B.1 T3.2 U1.11 U1.52 U1.57 U1.62 U1.105 U1.125 | length 3865.4
  Top Layer w2: 2152.01,1223.7 2182.35,1223.7 2188.05,1218 2231.95,1218 2237.65,1223.7 2267.99,1223.7
  Top Layer w8: 1676.44,1821 v1(1691.44,1806) ; C1.+@2130.92,1061 C1.+@2133.98,1061 ; U1.57@2573.98,1281 U1.57@2577.78,1280.79 U1.57@2581.48,1280.5 ; U1.62@2574.48,1182.5 2576.15,1182 U1.62@2577.78,1182.36 ; U1.11@3150.48,1757 U1.11@3150.62,1755.2
  Top Layer w10: v1(1051,1311) RN3D.1@1100,1311 ; ERASE.1@1295,1141 1311,1141 1335,1165 RN3A.1@1335,1205 ; 1485,1141 v2(1515,1171) 1515,1191.98 1530,1206.98 1530,1236 ; v2(1920,1255) 1938.99,1255 2015,1178.99 IC4.4@2012.01,1176 ; v2(2015.96,1084) 2015.96,1172.05 IC4.4@2012.01,1176 ; v2(2075,1176) IC4.4@2012.01,1176 ; U1.52@2577.78,1379.21 2579.57,1381 2615,1381 2625,1391 2625.44,1390.56 v1(2640.44,1390.56)
  Top Layer w11: 2470,1331 2478.17,1331.14 2530.89,1280.24 U1.57@2573.98,1281 ; 2515,1388.5 2515,1386 2520,1381 U1.52@2560,1381 ; U1.62@2577.78,1182.36 v2(2640,1182.36) ; U1.57@2581.48,1280.5 v1(2661.48,1280.5) ; 3075,1851 3105,1851 3150.48,1805.52 U1.11@3150.48,1757 ; v1(3117.98,1657) 3117.98,1677 3150.48,1709.5 3150.48,1754 3150.62,1753.64 U1.11@3150.62,1755.2 ; C7.2@3155,840 3176.5,818.5 3232.5,818.5 3288.41,874.41 U1.105@3288.41,904.8 3288.41,983.43 v1(3287.98,993) ; v1(3353.98,1309) 3362.51,1300.47 U1.125@3428.18,1300.47 3475.47,1300.47 C8.2@3510,1335
  Top Layer w12: v1(1930,1790) 1941,1790 1956,1805 1990,1771 ; R4.2@2963.25,1898.13 v1@3003.25,1858.13
  Top Layer w16: ERASE.1@1300,1090 1365,1090 1395,1060 1490,1060 1516,1086 1600,1086 C29.+@1620,1106 ; 2083,1301 2100,1301 2152.3,1248.7 2192.7,1248.7 2198.4,1243 2221.6,1243 2227.3,1248.7 2278.35,1248.7 2286.05,1241 2310,1241 ; v2(2115,1165) 2125,1165 2110,1180 C18.2@2175,1180 ; RN5A.2@3690,1611 3725,1611 3740,1621.52 v2(3740,1651) RN5B.1@3695,1696
  Top Layer w24: L2.1@2513.31,1736 2529.6,1739.19 v1@2562.73,1716.92
  Top Layer w32: C29.+@1629.94,1125.94 1685,1181 IC4.2@1755,1181 ; IC4.2@1773.96,1176 v2(1947.96,1176) IC4.4@2012.01,1176 ; v2(2115,1165) 2115,1119.98 2141.98,1093 2133.98,1085 C1.+@2133.98,1061
  Bottom Layer w10: v1(1051,1311) 1141,1221 1465,1221 v2(1515,1171)
  other v1: 2565,1711 3750,1711 3015,1855
+5V: C30.2 C36.1 C?.1 D3.A IC1.8 IC4.3 IC6.4 IC6.32 L4.P$2 PC2.+ POWER.5 R12.1 R14.1 R15.1 T1.2 T2.2 U2.P$12 U?.5 | length 5184.7
  Top Layer w10: v1(1190,1360) 1206.3,1360 R14.1@1245,1360 1315,1290 R15.1@1325,1290 ; C36.1@1425,1435 1457.99,1467.99 1457.99,1505 1472.83,1519.84 IC6.4@1488.54,1519.84 ; v1(1445,1605) 1505.56,1605 1511.56,1611 IC6.32@1516.1,1606.46 ; 1527.98,1448.98 1545,1466 1545,1496 1561.84,1512.84 1572.52,1512.84 ; 1625,1756 1670,1756 ; D3.A@1740,996 D3.A@1755,996 D3.A@1768,1009 ; v2@1849,1085 v2(1850,1086) ; v1(2350,781) v1@2350,791 ; 3565,941 3565,1096 ; U?.5@3600,1116 3585,1116 3565,1096 ; U?.5@3614,1395 3584,1395 3565,1376 3565,1096 ; 3770,791 3775,791
  Top Layer w12: v1@1638.48,1737.5 1663.89,1737.5 1678.82,1722.57
  Top Layer w16: 3770,791 3710,851 v1(3565,851) 3565,941 3595,971 C?.1@3630,971 C?.1@3720,971 C?.1@3810,971
  Top Layer w24: T2.2@1315,1635 1405,1635 v1@1435,1605 ; PC2.+@1585,816.51 1615.51,786 v1(1670,786) ; R12.1@1735,786 v1(1670,786) ; D3.A@1740,996 v1(1670,926) v1(1670,846) v1(1670,786) ; D3.A@1768,1009 1768,1085 v2@1849,1085 ; L4.P$2@2260,881 v1@2350,791 ; v1(2350,781) 2400,831 v1(2400,866)
  Top Layer w32: 1615.02,1756 1625,1756 ; 1764.96,1185 1773.96,1185
  Bottom Layer w16: v1(1190,1360) 1190,1316 1435,1316 1435,1596 1444,1605 v1(1445,1605) ; v1(2400,866) 2435,866 2520,781 3050,781 3120,851 v1(3565,851)
  Bottom Layer w24: v1(1670,846) 1760,756 2325,756 v1(2350,781)
  other v1: 1640,1746
\M1_IN: RM3.1 U?.4@3614,1167 | length 122.7
  Top Layer w10: U?.4@3609,1167 3584,1167 3579,1172 3579,1220 3595,1236 RM3.1@3615,1236
\M2_IN: RM6.1 U?.4@3614,1447 | length 131.9
  Top Layer w10: U?.4@3614,1447 3589,1447 3580,1456 3580,1506 3590,1516 3597.01,1516 RM6.1@3620,1516
AD0: ADCL.1 U1.78 | length 7.9
  Top Layer w8: U1.78@2756.92,904.8 U1.78@2757.98,897
AD1: ADCL.2 U1.79 | length 1.4
  Top Layer w8: U1.79@2776.6,904.8 U1.79@2777.98,904.8
AD2: ADCL.3 U1.80
AD3: U1.81
AD4: U1.82
AD5: U1.83 | length 7.9
  Top Layer w8: U1.83@2853.98,897 U1.83@2855.34,904.8
AD6: U1.84
AD7: U1.85 | length 7.8
  Top Layer w8: U1.85@2893.98,897 U1.85@2894.71,904.8
AD8: U1.88 U2.P$2
AD9: U1.89 U2.P$19 | length 7.8
  Top Layer w8: U1.89@2973.45,904.8 U1.89@2973.98,897
AD10: U1.90 | length 0.9
  Top Layer w8: U1.90@2993.14,904.8 2993.33,905 U1.90@2993.98,905
AD11(TXD3): U1.91 | length 2.4
  Top Layer w8: U1.91@3011.98,907 U1.91@3012.82,904.8
AD14(RXD3): U1.92
AREF: BR1.1 COMMUNICATION.5
AVREF: C19.2 L3.2 U1.75 | length 165.6
  Top Layer w11: U1.75@2697.86,899.8 2699.14,867.56 2745,821 2760,821
  Top Layer w12: 2710,766 2760,783.5
BD+: J3.P3 R20.2 Z4.2 | length 993.3
  Top Layer w10: J3.P3@941,1167.23 976,1167.23 976.5,1166.73 976.5,1145.5 996,1126 1011,1126 1035,1150 1035,1157.9 1042.1,1165 v1(1055,1165)
  Bottom Layer w10: v1(1055,1165) 985,1235 985,1315 1086,1416 1086,1436.36 1100.64,1451 1121,1451 1395,1725 1395,1755 v1(1415,1775)
BD-: J3.P2 R19.2 Z3.2 | length 874.5
  Top Layer w10: J3.P2@941,1186.8 990,1186.8 990,1181 Z3.2@1006,1181 1021,1181 v1@1051,1211 ; 1575,1666 1580,1661 1589.51,1661
  Bottom Layer w10: v1(1055,1210) 1000,1265 1000,1310.2 1025.8,1336 1047.4,1357.6 1077.96,1357.6 1420,1699.64 v1(1420,1725)
BOOST: C42.1 D3.C IC2.1 | length 244.4
  Top Layer w16: D3.C@1755,862.14 1796.14,862.14 1825,891 1825,926 1862.6,888.4 1913.4,888.4 IC2.1@1930,905
CANRX0: U1.24 | length 2.3
  Top Layer w8: U1.24@2893.98,1753 U1.24@2894.71,1755.2
CANTX0: U1.23 | length 0.4
  Top Layer w8: U1.23@2913.98,1755.2 U1.23@2914.4,1755.2
CANTX1/IO: U1.140
CMP: C31.2 IC1.5 Q2.3 RN4.3 RN4.4 | length 839.5
  Top Layer w12: 1676.85,1835.35 1729.35,1835.35 v1(1735,1841) ; 1990,1511 2035,1466 2044.18,1466 2078.43,1500.25 ; 2078.43,1468.76 2078.43,1442.57 2117.83,1403.17 2110.65,1396 ; 2080,1468.76 2080,1501
  Bottom Layer w12: v1(1735,1841) 1730,1841 1785,1786 1785,1767.02 1813.02,1739 1965.64,1739 1989.32,1715.32 1990,1716 1990,1511
  other v1: 1925,1470
D+: R6.1 U1.37 USB1.3 Z1.1 | length 1511.6
  Top Layer w10: USB1.3@1005,1783.82 1005,1810 1025,1830 Z1.1@1155,1830 ; 1306.98,2186.64 ccw(c1320.62,2180.64) 1314.62,2167 1314.98,2167 ccw(c1319.98,2180) 1332.98,2175 cw(c1350.98,2175) 1350.98,2193 cw(c1347.98,2178) 1362.98,2175 1362.98,2165 ccw(c1374.98,2163) 1372.98,2151 ccw(c1372.98,2169) 1390.98,2169 cw(c1405.98,2168) 1406.98,2183 cw(c1402.98,2167) 1418.98,2163 ccw(c1434.98,2155) 1426.98,2139 ccw(c1430.98,2157) 1448.98,2153 cw(c1461.71,2132.89) 1475.42,2152.35 1575.64,2052.45 ccw(c1592.44,2067.61) 1591.44,2045 1758.62,2045 ccw(c1758.62,2070) 1776.3,2052.32 1780.66,2056.68 cw(c1798.34,2039) 1798.34,2064 2027.62,2064 ccw(c2027.62,2089) 2045.3,2071.32 ; U1.37@2577.78,1674.49 2603.49,1674.49 2606,1677 2606,1725 v1(2570,1761) 2616.63,1802.15 2619.42,1846.66 2631.65,1857.46 R6.1@2655,1856
  Bottom Layer w10: 2445,1801 2530,1801 v1(2570,1761)
D-: R5.1 U1.38 USB1.2 Z2.1 | length 1499.3
  Top Layer w10: USB1.2@1030,1790 1040.81,1800.81 1040.81,1804 1051.8,1815 1135,1815 1136.94,1813.06 1136.94,1791.59 1148.53,1780 1155,1780 Z2.1@1160,1775 ; 1138.49,2275 cw(c1127.96,2248.38) 1154.33,2259.5 1161.33,2248.17 ccw(c1217.42,2297.78) 1213.56,2223 cw(c1220.74,2022.03) 1357.78,2169.21 ; 1502.77,2165.21 1574.34,2093.64 ccw(c1617.93,2128.41) 1611.69,2073 1742.47,2073 ccw(c1742.88,2107.04) 1766.66,2082.68 cw(c1786.75,2066) 1784.34,2092 2015.27,2092 ; U1.38@2577.78,1654.8 2618.8,1654.8 2618.8,1659.8 2620,1658.6 v1(2620,1761) 2620,1776 2670,1826 2670,1826.36 2684.64,1841 2685,1841 2695,1851 R5.1@2760,1851
  Bottom Layer w10: 2465,1781 2495,1781 2540,1736 2595,1736 v1(2620,1761)
DAC0: ADCL.7
DAC0(CANRX1): U1.76 | length 7.8
  Top Layer w8: U1.76@2717.55,904.8 U1.76@2717.98,897
DAC1: ADCL.8 U1.77
EEXTINT: U1.25
EMDC: U1.123
EMDIO: U1.127
EN: IC2.4 R10.2 | length 70.6
  Top Layer w16: IC2.4@2030.28,832.6 2030.28,775.72 R10.2@2040,766
ERASE_CMD: IC6.23 T3.3 | length 774.2
  Top Layer w8: v1(2010,1325) 2011.5,1326.5 2090.5,1326.5 2105,1341 2145,1301
  Top Layer w10: 1720.07,1506.96 1725.84,1506.96 1734.63,1515.75 1734.63,1545.75 ; v1@1720.37,1569.25 1735.37,1554.25
  Bottom Layer w10: v1@1720.37,1569.25 1735.37,1554.25 ; 1729.63,1400.75 1754.63,1375.75 ; 1734.63,1385.75 1734.63,1545.75 ; 1815,1406 2032.96,1406 2060,1376 2010,1326 v1(2010,1325)
  other v1: 1715.37,1584.25
ERASE_S: ERASE.2 T3.1 U1.130 | length 2622.3
  Top Layer w8: v1(1995,1280) 2056,1280 2115,1221 ; 2130,1216 2146.7,1232.7 2186.07,1232.7 2191.77,1227 2228.23,1227 2233.93,1232.7 2271.72,1232.7 2276.99,1227.43 2276.99,1226.08 2289.75,1213.31 2343.63,1213.31 2346.31,1216 2370,1216 2370,1266 2385,1281 2480,1281 v1(2490,1271) ; 2645.98,961 2693.98,1009 2745.98,1009 v1(2753.98,1017) ; v1(2873.98,1369) 2885.98,1357 2937.98,1357 2970.98,1390 3212.98,1390 3229.98,1373 3353.98,1373 3379.88,1398.9 U1.130@3428.18,1398.9
  Top Layer w10: v1(1510,1121) 1505,1116 1510,1111 1520,1121 1550,1121 1570,1141 1580,1141 v1(1620,1181) ; 2115,1221 2121,1221
  Bottom Layer w8: v1(2753.98,1017) 2757.98,1017 2765.98,1009 2805.98,1009 2813.98,1017 2813.98,1045 2865.98,1097 2865.98,1213 2857.98,1221 2857.98,1353 v1(2873.98,1369)
  Bottom Layer w10: v1(1620,1181) 1735,1181 1873,1319 1956,1319 v1(1995,1280) ; v1(2490,1271) 2535,1271 2575,1231 2730,1231
ERX_DV: U1.119
ERX_ER: U1.122
ERXD0: U1.120
ERXD1: U1.121
ETX_CLK: U1.113
ETX_EN: U1.114
ETXD0: U1.115
ETXD1: U1.118
FB: IC2.3 R11.1 R12.2 | length 149.4
  Top Layer w24: R12.2@1810,786 1820,786 1830,776 1902.12,776 1939.72,813.6
GATE_CMD: IC1.7 T1.3 | length 167
  Top Layer w10: 1520,1761 1520,1783 1575.02,1783 1578.02,1780 1579.27,1780 1581.77,1782.5 1620.23,1782.5 1621.73,1781 1655,1781 1660,1786